# EAGLE board printversion (EAGLE 7.5.0)
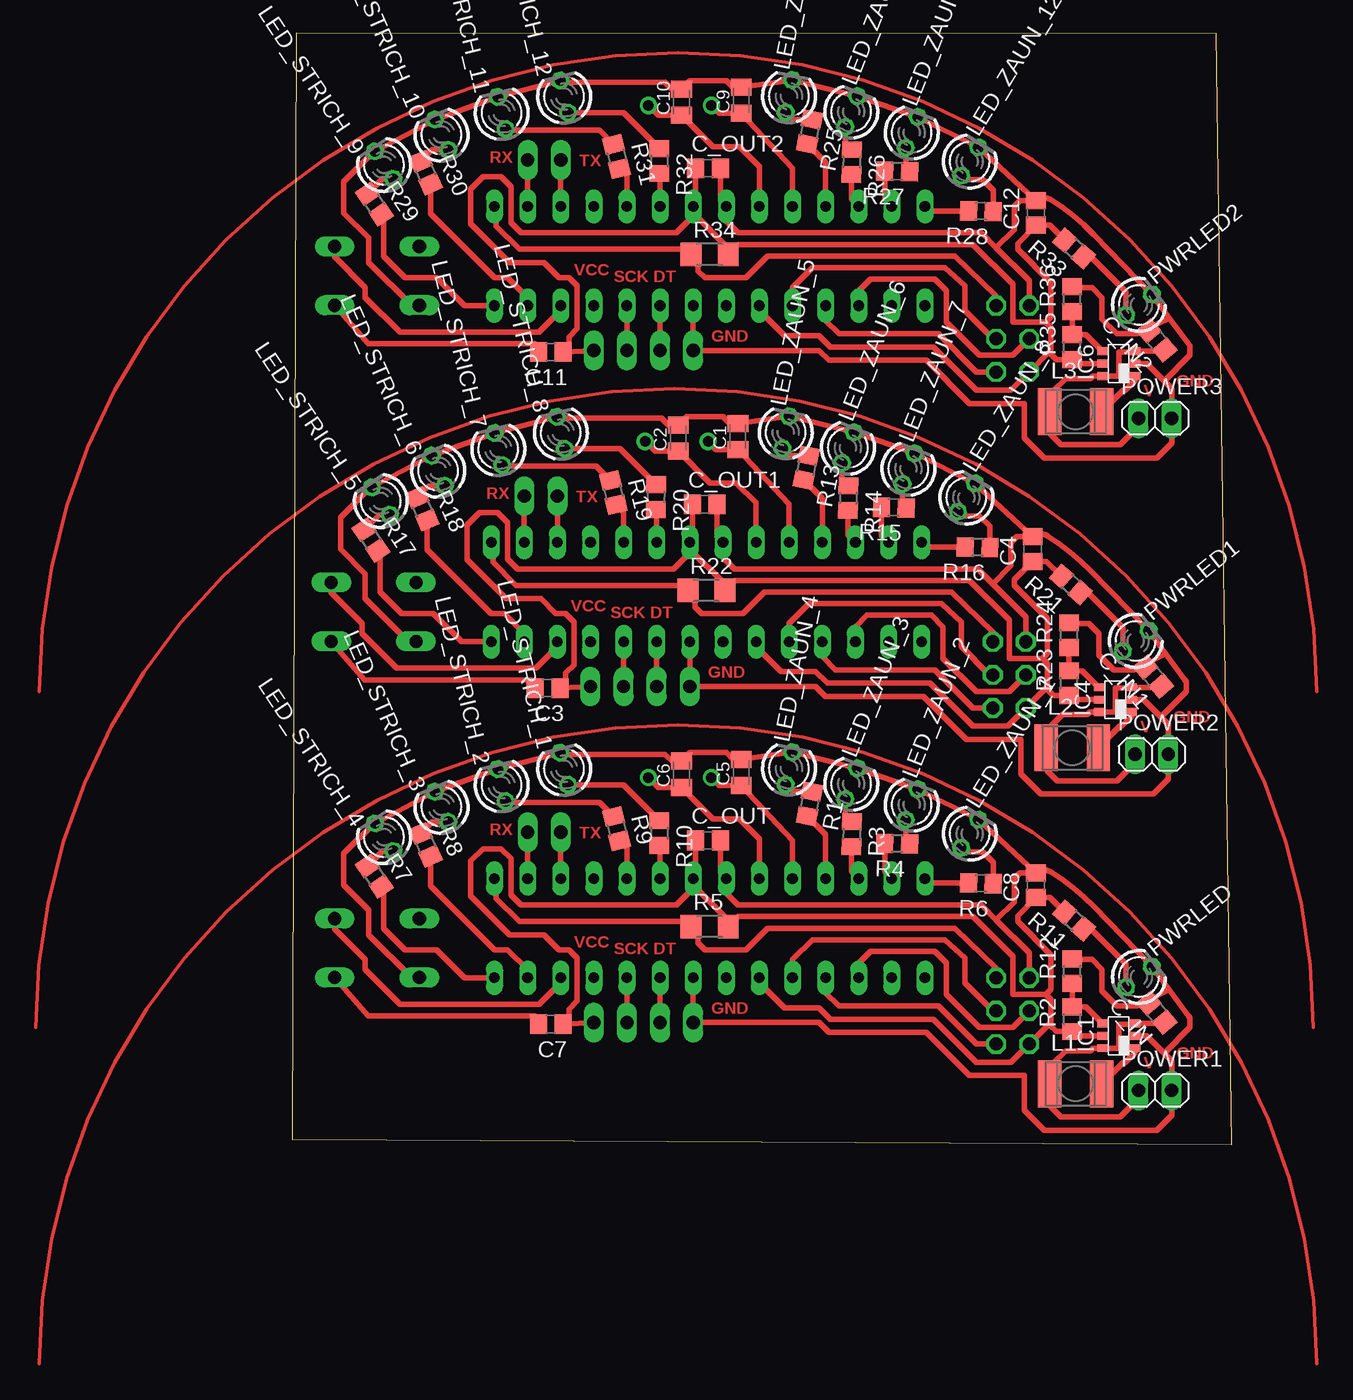
[diagram p0: board, top side]
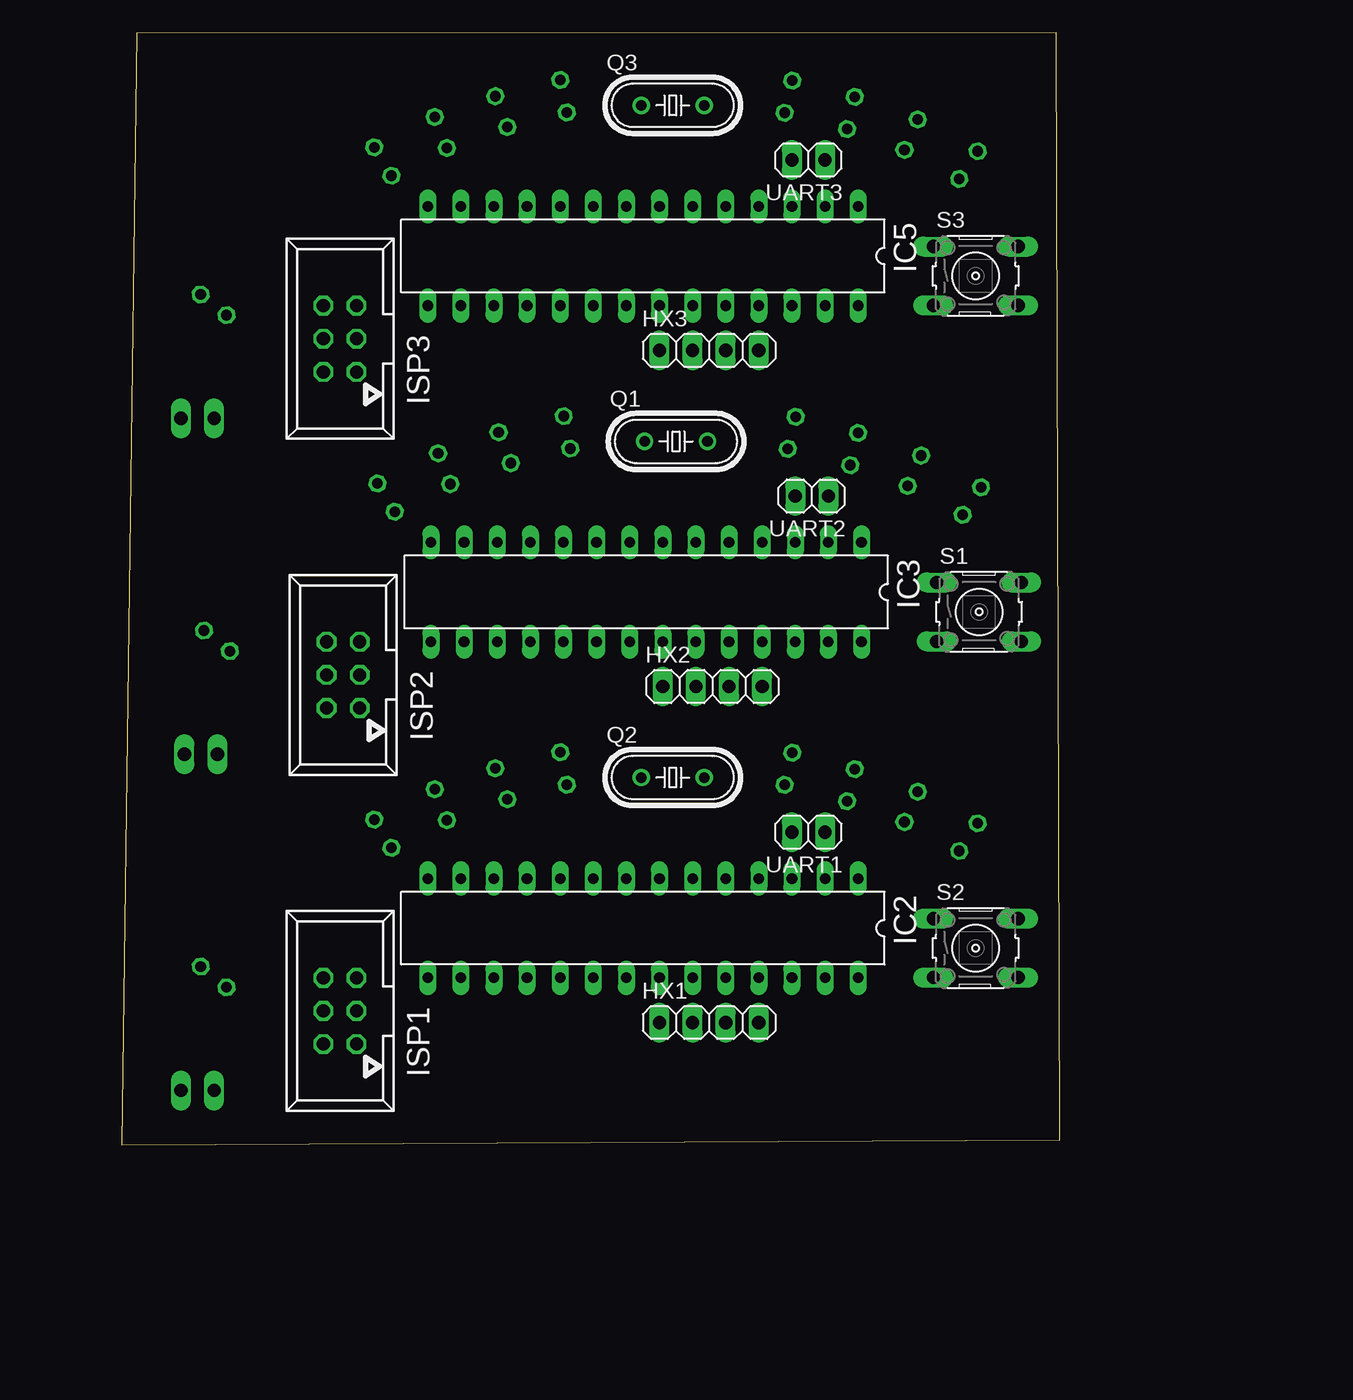
[diagram p1: board, bottom side, seen from below]

Size 71.98 x 85.32 mm. Coordinates in mm from the lower left corner, seen from the top.
Outline: 0,0.37 0.27,85.32 70.8,85.28 71.98,0 0,0.37
Copper layers (1*16): Top 0.035mm / dielectric 1.5mm / Bottom 0.035mm
Design rules "default *": minimum track width 10mil, minimum drill 24mil, track to track 8mil, track to pad 8mil, pad to pad 8mil, via to via 8mil, smd to smd 8mil, copper to edge 25mil, drill to drill 8mil, minimum pad ring 10mil, minimum via ring 8mil, stop-mask expansion 4mil, vias tented up to drill 0mil, thermal gap 10mil

## Footprints (pad centres in the part's own frame; a part is rotated, then mirrored left to right if it is on the bottom)
C0805K = smd 1.3 x 1.6: 1 -1,0; 2 1,0
C0805 = smd 1.3 x 1.5: 1 -0.95,0; 2 0.95,0
1X04 = drill 1.016 long: 1 -3.81,0; 2 -1.27,0; 3 1.27,0; 4 3.81,0
TSOT23-6_DDC = smd 0.6 x 0.8: 1 -0.95,-1.25; 2 0,-1.25; 3 0.95,-1.25; 4 0.95,1.25; 5 0,1.25; 6 -0.95,1.25
DIL28-3 = drill 0.813 long: 1 -16.51,-3.81; 2 -13.97,-3.81; 3 -11.43,-3.81; 4 -8.89,-3.81; 5 -6.35,-3.81; 6 -3.81,-3.81; 7 -1.27,-3.81; 8 1.27,-3.81; 9 3.81,-3.81; 10 6.35,-3.81; 11 8.89,-3.81; 12 11.43,-3.81; 13 13.97,-3.81; 14 16.51,-3.81; 15 16.51,3.81; 16 13.97,3.81; 17 11.43,3.81; 18 8.89,3.81; 19 6.35,3.81; 20 3.81,3.81; 21 1.27,3.81; 22 -1.27,3.81; 23 -3.81,3.81; 24 -6.35,3.81; 25 -8.89,3.81; 26 -11.43,3.81; 27 -13.97,3.81; 28 -16.51,3.81
057-006-1 = drill 1 octagon: 1 -2.54,-1.27; 2 -2.54,1.27; 3 0,-1.27; 4 0,1.27; 5 2.54,-1.27; 6 2.54,1.27
L4532P = smd 1.8 x 3.6: 1 -2,0; 2 2,0
LED3MM = drill 0.813 octagon: A -1.27,0; K 1.27,0
1X02 = drill 1.016 long: 1 -1.27,0; 2 1.27,0
HC49/S = drill 0.813: 1 2.413,0; 2 -2.413,0
R0805 = smd 1.3 x 1.5: 1 -0.95,0; 2 0.95,0
R1206 = smd 1.6 x 1.803: 1 -1.422,0; 2 1.422,0
B3F-10XX = drill 1.016 long: 1 -3.251,2.261; 2 3.251,2.261; 3 -3.251,-2.261; 4 3.251,-2.261

## Placement (x,y rotation side)
C1  18pF  [C0805K]  34.14,54.34 90 top
C2  18pF  [C0805K]  29.57,54.22 90 top
C3  1uF  [C0805]  19.53,35.04 180 top
C4  100n  [C0805]  56.74,45.71 90 top
C5  18pF  [C0805K]  34.39,28.56 90 top
C6  18pF  [C0805K]  29.82,28.43 90 top
C7  1uF  [C0805]  19.79,9.26 180 top
C8  100n  [C0805]  57,19.93 90 top
C9  18pF  [C0805K]  34.39,80.12 90 top
C10  18pF  [C0805K]  29.82,80 90 top
C11  1uF  [C0805]  19.79,60.82 180 top
C12  100n  [C0805]  57,71.49 90 top
C_IN  [C0805]  66.27,10.15 130 top
C_IN1  [C0805]  66.01,35.93 130 top
C_IN2  [C0805]  66.27,61.71 130 top
C_OUT  [C0805]  31.85,23.35 0 top
C_OUT1  [C0805]  31.6,49.14 0 top
C_OUT2  [C0805]  31.85,74.92 0 top
HX1  JP1  [1X04]  26.9,9.38 0 bottom
HX2  JP1  [1X04]  26.64,35.17 0 bottom
HX3  JP1  [1X04]  26.9,60.95 0 bottom
IC1  TPS61070DDC  [TSOT23-6_DDC]  63.35,8.37 90 top
IC2  MEGA8-P  [DIL28-3]  31.98,16.62 180 bottom
IC3  MEGA8-P  [DIL28-3]  31.72,42.4 180 bottom
IC4  TPS61070DDC  [TSOT23-6_DDC]  63.09,34.15 90 top
IC5  MEGA8-P  [DIL28-3]  31.98,68.19 180 bottom
IC6  TPS61070DDC  [TSOT23-6_DDC]  63.35,59.93 90 top
ISP1  ISP-Connector  [057-006-1]  55.22,10.27 90 bottom
ISP2  ISP-Connector  [057-006-1]  54.97,36.05 90 bottom
ISP3  ISP-Connector  [057-006-1]  55.22,61.84 90 bottom
L1  [L4532P]  60.05,4.69 0 top
L2  [L4532P]  59.79,30.47 0 top
L3  [L4532P]  60.05,56.25 0 top
LED_STRICH_1  [LED3MM]  20.81,28.85 103.6 top
LED_STRICH_2  [LED3MM]  16.02,27.6 103.6 top
LED_STRICH_3  [LED3MM]  11.41,25.93 113.6 top
LED_STRICH_4  [LED3MM]  7,23.6 123.6 top
LED_STRICH_5  [LED3MM]  6.75,49.38 123.6 top
LED_STRICH_6  [LED3MM]  11.15,51.71 113.6 top
LED_STRICH_7  [LED3MM]  15.77,53.38 103.6 top
LED_STRICH_8  [LED3MM]  20.56,54.63 103.6 top
LED_STRICH_9  [LED3MM]  7,75.17 123.6 top
LED_STRICH_10  [LED3MM]  11.41,77.49 113.6 top
LED_STRICH_11  [LED3MM]  16.02,79.16 103.6 top
LED_STRICH_12  [LED3MM]  20.81,80.41 103.6 top
LED_ZAUN_1  [LED3MM]  51.93,23.87 58.6 top
LED_ZAUN_2  [LED3MM]  47.48,26.1 68.6 top
LED_ZAUN_3  [LED3MM]  42.84,27.7 68.6 top
LED_ZAUN_4  [LED3MM]  38.07,28.88 78.6 top
LED_ZAUN_5  [LED3MM]  37.81,54.66 78.6 top
LED_ZAUN_6  [LED3MM]  42.59,53.48 68.6 top
LED_ZAUN_7  [LED3MM]  47.23,51.88 68.6 top
LED_ZAUN_8  [LED3MM]  51.68,49.65 58.6 top
LED_ZAUN_9  [LED3MM]  38.07,80.44 78.6 top
LED_ZAUN_10  [LED3MM]  42.84,79.26 68.6 top
LED_ZAUN_11  [LED3MM]  47.48,77.66 68.6 top
LED_ZAUN_12  [LED3MM]  51.93,75.43 58.6 top
POWER1  JP2  [1X02]  66.14,4.18 0 top
POWER2  JP2  [1X02]  65.89,29.96 0 top
POWER3  JP2  [1X02]  66.14,55.74 0 top
PWRLED  [LED3MM]  64.91,12.88 38.6 top
PWRLED1  [LED3MM]  64.66,38.66 38.6 top
PWRLED2  [LED3MM]  64.91,64.45 38.6 top
Q1  16MHz  [HC49/S]  29.44,53.96 0 bottom
Q2  16MHz  [HC49/S]  29.69,28.18 0 bottom
Q3  16MHz  [HC49/S]  29.69,79.74 0 bottom
R1  470  [R0805]  39.63,26.16 258.6 top
R2  [R0805]  59.79,9.64 90 top
R3  470  [R0805]  42.86,23.83 268.6 top
R4  470  [R0805]  46.36,23.1 178.6 top
R5  10k  [R1206]  31.98,16.75 0 top
R6  470  [R0805]  52.78,20.06 178.6 top
R7  470  [R0805]  6.25,20.61 303.6 top
R8  470  [R0805]  10.19,23.02 293.6 top
R9  470  [R0805]  24.84,24.26 283.6 top
R10  470  [R0805]  28.11,23.91 269.6 top
R11  470  [R0805]  59.93,17.21 138.6 top
R12  [R0805]  59.79,13.32 90 top
R13  470  [R0805]  39.38,51.94 258.6 top
R14  470  [R0805]  42.61,49.61 268.6 top
R15  470  [R0805]  46.1,48.88 178.6 top
R16  470  [R0805]  52.52,45.84 178.6 top
R17  470  [R0805]  6,46.39 303.6 top
R18  470  [R0805]  9.93,48.8 293.6 top
R19  470  [R0805]  24.59,50.04 283.6 top
R20  470  [R0805]  27.86,49.7 269.6 top
R21  470  [R0805]  59.67,42.99 138.6 top
R22  10k  [R1206]  31.72,42.53 0 top
R23  [R0805]  59.54,35.42 90 top
R24  [R0805]  59.54,39.1 90 top
R25  470  [R0805]  39.63,77.72 258.6 top
R26  470  [R0805]  42.86,75.39 268.6 top
R27  470  [R0805]  46.36,74.67 178.6 top
R28  470  [R0805]  52.78,71.62 178.6 top
R29  470  [R0805]  6.25,72.18 303.6 top
R30  470  [R0805]  10.19,74.58 293.6 top
R31  470  [R0805]  24.84,75.82 283.6 top
R32  470  [R0805]  28.11,75.48 269.6 top
R33  470  [R0805]  59.93,68.77 138.6 top
R34  10k  [R1206]  31.98,68.31 0 top
R35  [R0805]  59.79,61.2 90 top
R36  [R0805]  59.79,64.88 90 top
S1  S1  [B3F-10XX]  6.2,40.88 0 bottom
S2  S1  [B3F-10XX]  6.45,15.1 0 bottom
S3  S1  [B3F-10XX]  6.45,66.66 0 bottom
UART1  JP2  [1X02]  19.28,23.99 180 bottom
UART2  JP2  [1X02]  19.02,49.77 180 bottom
UART3  JP2  [1X02]  19.28,75.55 180 bottom

## Library data of the parts
C1 C2 C5 C6 C9 C10 R1-R4 R6-R21 R23-R33 R35 R36 = resistor
C3 C4 C7 C8 C11 C12 C_IN C_IN1 C_IN2 C_OUT C_OUT1 C_OUT2 R5 R22 R34 = rcl-2
HX1-HX3 POWER1-POWER3 UART1-UART3 = pinhead
IC1 IC4 IC6 = texas; MPN: TPS61070DDCR; OC_FARNELL: 1461062; OC_NEWARK: 64M3125
IC2 IC3 IC5 = atmel; OC_FARNELL: unknown; OC_NEWARK: unknown
ISP1-ISP3 = con-panduit; OC_FARNELL: unknown; OC_NEWARK: unknown
L1-L3 = rcl
LED_STRICH_1-LED_STRICH_12 LED_ZAUN_1-LED_ZAUN_12 PWRLED PWRLED1 PWRLED2 = led
Q1-Q3 = crystal; OC_FARNELL: 1667008; OC_NEWARK: unknown
S1-S3 = switch-omron; MPN: B3F-1000; OC_FARNELL: 176432; OC_NEWARK: 36M3542

## Nets
+5V: C7.1 C8.1 C_OUT.1 HX1.4 IC1.5 IC2.7 IC2.20 ISP1.2 R2.1 R5.2 R11.2
+5V1: C3.1 C4.1 C_OUT1.1 HX2.4 IC3.7 IC3.20 IC4.5 ISP2.2 R21.2 R22.2 R23.1
+5V2: C11.1 C12.1 C_OUT2.1 HX3.4 IC5.7 IC5.20 IC6.5 ISP3.2 R33.2 R34.2 R35.1
GND: C5.2 C6.2 C8.2 C_IN.2 C_OUT.2 HX1.1 IC1.2 IC2.8 IC2.22 ISP1.6 LED_STRICH_1.K LED_STRICH_2.K LED_STRICH_3.K LED_STRICH_4.K LED_ZAUN_1.K LED_ZAUN_2.K LED_ZAUN_3.K LED_ZAUN_4.K POWER1.2 PWRLED.K R12.2 S2.3
GND1: C1.2 C2.2 C4.2 C_IN1.2 C_OUT1.2 HX2.1 IC3.8 IC3.22 IC4.2 ISP2.6 LED_STRICH_5.K LED_STRICH_6.K LED_STRICH_7.K LED_STRICH_8.K LED_ZAUN_5.K LED_ZAUN_6.K LED_ZAUN_7.K LED_ZAUN_8.K POWER2.2 PWRLED1.K R24.2 S1.3
GND2: C9.2 C10.2 C12.2 C_IN2.2 C_OUT2.2 HX3.1 IC5.8 IC5.22 IC6.2 ISP3.6 LED_STRICH_9.K LED_STRICH_10.K LED_STRICH_11.K LED_STRICH_12.K LED_ZAUN_9.K LED_ZAUN_10.K LED_ZAUN_11.K LED_ZAUN_12.K POWER3.2 PWRLED2.K R36.2 S3.3
N$1: LED_ZAUN_4.A R1.1
N$2: LED_ZAUN_3.A R3.1
N$3: LED_ZAUN_2.A R4.1
N$4: C5.1 IC2.10 Q2.2
N$5: IC1.1 L1.2
N$6: IC1.4 R2.2 R12.1
N$7: LED_ZAUN_1.A R6.1
N$8: LED_STRICH_4.A R7.1
N$10: LED_STRICH_3.A R8.1
N$11: LED_STRICH_2.A R9.1
N$12: LED_STRICH_1.A R10.1
N$13: PWRLED.A R11.1
N$14: C6.1 IC2.9 Q2.1
N$15: C7.2 S2.4
N$16: LED_ZAUN_5.A R13.1
N$17: LED_ZAUN_6.A R14.1
N$18: LED_ZAUN_7.A R15.1
N$19: LED_ZAUN_8.A R16.1
N$20: LED_STRICH_5.A R17.1
N$21: LED_STRICH_6.A R18.1
N$22: LED_STRICH_7.A R19.1
N$23: LED_STRICH_8.A R20.1
N$24: PWRLED1.A R21.1
N$25: C1.1 IC3.10 Q1.2
N$26: C2.1 IC3.9 Q1.1
N$27: C3.2 S1.4
N$28: IC4.1 L2.2
N$29: IC4.4 R23.2 R24.1
N$31: LED_ZAUN_9.A R25.1
N$32: LED_ZAUN_10.A R26.1
N$33: LED_ZAUN_11.A R27.1
N$34: LED_ZAUN_12.A R28.1
N$35: LED_STRICH_9.A R29.1
N$36: LED_STRICH_10.A R30.1
N$37: LED_STRICH_11.A R31.1
N$38: LED_STRICH_12.A R32.1
N$39: PWRLED2.A R33.1
N$40: C9.1 IC5.10 Q3.2
N$41: C10.1 IC5.9 Q3.1
N$42: C11.2 S3.4
N$43: IC6.1 L3.2
N$44: IC6.4 R35.2 R36.1
PB0/LED_ZAUN_1: IC2.14 R6.2
PB0/LED_ZAUN_2: IC3.14 R16.2
PB0/LED_ZAUN_3: IC5.14 R28.2
PB1: IC2.15
PB2: IC2.16
PB3: IC3.16
PB3/MOSI: IC2.17 ISP1.4
PB3/MOSI1: IC3.17 ISP2.4
PB3/MOSI2: IC5.17 ISP3.4
PB4: IC3.15
PB4/MISO: IC2.18 ISP1.1
PB4/MISO1: IC3.18 ISP2.1
PB4/MISO2: IC5.18 ISP3.1
PB5: IC5.16
PB5/SCK: IC2.19 ISP1.3
PB5/SCK1: IC3.19 ISP2.3
PB5/SCK2: IC5.19 ISP3.3
PB6: IC5.15
PC0/DT: HX1.2 IC2.23
PC0/DT1: HX2.2 IC3.23
PC0/DT2: HX3.2 IC5.23
PC1: IC3.25
PC1/SCK: HX1.3 IC2.24
PC1/SCK1: HX2.3 IC3.24
PC1/SCK2: HX3.3 IC5.24
PC2: IC2.25
PC3: IC2.26 S2.2
PC4: IC3.26 S1.2
PC4/LED_STRICH_1: IC3.27 R18.2
PC4/LED_STRICH_2: IC5.27 R30.2
PC4/LED_STRICH_3: IC2.27 R8.2
PC5: IC5.25
PC5/LED_STRICH_1: IC3.28 R17.2
PC5/LED_STRICH_2: IC5.28 R29.2
PC5/LED_STRICH_4: IC2.28 R7.2
PC6: IC5.26 S3.2
PD0/RXD: IC2.2 UART1.1
PD0/RXD1: IC3.2 UART2.1
PD0/RXD2: IC5.2 UART3.1
PD1: IC3.4
PD1/TXD: IC2.3 UART1.2
PD1/TXD1: IC3.3 UART2.2
PD1/TXD2: IC5.3 UART3.2
PD2: IC2.4
PD3: IC5.4
PD3/LED_STRICH_1: IC3.5 R19.2
PD3/LED_STRICH_2: IC2.5 R9.2
PD3/LED_STRICH_3: IC5.5 R31.2
PD4/LED_STRICH_1: IC2.6 R10.2
PD4/LED_STRICH_2: IC3.6 R20.2
PD4/LED_STRICH_3: IC5.6 R32.2
PD5/LED_ZAUN_1: IC3.11 R13.2
PD5/LED_ZAUN_2: IC5.11 R25.2
PD5/LED_ZAUN_4: IC2.11 R1.2
PD6/LED_ZAUN_1: IC3.12 R14.2
PD6/LED_ZAUN_2: IC5.12 R26.2
PD6/LED_ZAUN_3: IC2.12 R3.2
PD7/LED_ZAUN_1: IC3.13 R15.2
PD7/LED_ZAUN_2: IC2.13 R4.2
PD7/LED_ZAUN_3: IC5.13 R27.2
RESET: IC2.1 ISP1.5 R5.1
RESET1: IC3.1 ISP2.5 R22.1
RESET2: IC5.1 ISP3.5 R34.1
V_IN: C_IN.1 IC1.3 IC1.6 L1.1 POWER1.1
V_IN1: C_IN1.1 IC4.3 IC4.6 L2.1 POWER2.1
V_IN2: C_IN2.1 IC6.3 IC6.6 L3.1 POWER3.1
VDD: IC2.21
VDD1: IC3.21
VDD2: IC5.21

## Tracks (layer width: path | path; a pad name or v marks a point on that pad's centre or on a via)
+5V
  Top 0.406: 30.71,19.67 IC2.7 30.9,20.63 C_OUT.1 | 57.76,11.54 55.22,11.54 55.22,14.46 52.17,17.51 34.16,17.51 R5.2 33.12,17.03 33.12,17.51 30.96,19.67 30.71,19.67 | 57.76,11.54 58.14,11.16 58.14,9.38 58.01,9.26 | 58.01,9.26 ISP1.2 55.09,6.34 52.43,6.34 49.12,9.64 41.25,9.64 40.36,10.53 37.69,10.53 35.79,12.43 IC2.20 | HX1.4 C7.1 21.18,9.32 21.18,10.4 21.82,11.04 21.82,14.34 21.18,14.97 20.42,14.97 19.28,16.12 16.61,16.12 13.62,19.1 13.62,21.76 14.58,22.72 15.98,22.72 16.74,21.96 16.74,19.16 17.5,18.4 29.44,18.4 30.71,19.67 | 57.76,11.54 58.14,11.92 58.14,14.59 55.6,17.13 55.6,17.58 C8.1 58.08,18.98 R11.2 | IC1.5 62.04,8.31 61.98,8.37 60.17,8.37 59.85,8.69 R2.1 58.58,8.69 58.01,9.26
+5V1
  Top 0.406: 30.45,45.45 IC3.7 30.65,46.41 C_OUT1.1 | 57.51,37.32 54.97,37.32 54.97,40.25 51.92,43.29 33.91,43.29 R22.2 32.87,42.81 32.87,43.29 30.71,45.45 30.45,45.45 | 57.51,37.32 57.89,36.94 57.89,35.17 57.76,35.04 | 57.76,35.04 ISP2.2 54.84,32.12 52.17,32.12 48.87,35.42 41,35.42 40.11,36.31 37.44,36.31 35.53,38.21 IC3.20 | HX2.4 C3.1 20.93,35.1 20.93,36.18 21.56,36.82 21.56,40.12 20.93,40.75 20.17,40.75 19.02,41.9 16.36,41.9 13.37,44.88 13.37,47.55 14.33,48.5 15.72,48.5 16.48,47.74 16.48,44.94 17.25,44.18 29.18,44.18 30.45,45.45 | 57.51,37.32 57.89,37.71 57.89,40.37 55.35,42.91 55.35,43.36 C4.1 57.82,44.76 R21.2 | IC4.5 61.78,34.09 61.72,34.15 59.92,34.15 59.6,34.47 R23.1 58.33,34.47 57.76,35.04
+5V2
  Top 0.406: 30.71,71.23 IC5.7 30.9,72.19 C_OUT2.1 | 57.76,63.11 55.22,63.11 55.22,66.03 52.17,69.07 34.16,69.07 R34.2 33.12,68.59 33.12,69.07 30.96,71.23 30.71,71.23 | 57.76,63.11 58.14,62.72 58.14,60.95 58.01,60.82 | 58.01,60.82 ISP3.2 55.09,57.9 52.43,57.9 49.12,61.2 41.25,61.2 40.36,62.09 37.69,62.09 35.79,63.99 IC5.20 | HX3.4 C11.1 21.18,60.89 21.18,61.96 21.82,62.6 21.82,65.9 21.18,66.53 20.42,66.53 19.28,67.68 16.61,67.68 13.62,70.66 13.62,73.33 14.58,74.28 15.98,74.28 16.74,73.52 16.74,70.73 17.5,69.96 29.44,69.96 30.71,71.23 | 57.76,63.11 58.14,63.49 58.14,66.15 55.6,68.69 55.6,69.14 C12.1 58.08,70.54 R33.2 | IC6.5 62.04,59.87 61.98,59.93 60.17,59.93 59.85,60.25 R35.1 58.58,60.25 58.01,60.82
GND
  Top 0.406: S2.3 9.09,12.84 5.82,16.12 5.82,18.02 3.91,19.93 3.91,22.34 6.23,24.66 LED_STRICH_4.K LED_STRICH_3.K LED_STRICH_2.K LED_STRICH_1.K 20.64,29.96 28.55,29.96 29.07,29.43 C6.2 30.47,30.09 33.25,30.09 33.77,29.56 C5.2 LED_ZAUN_4.K LED_ZAUN_3.K LED_ZAUN_2.K LED_ZAUN_1.K C8.2 | C_OUT.2 32.8,20.88 IC2.8 33.25,19.29 34.14,18.4 52.81,18.4 53.95,17.26 | IC2.22 HX1.1 40.36,9.38 41.12,8.62 48.62,8.62 51.92,5.32 56.11,5.32 56.11,2.65 57.63,1.13 66.27,1.13 67.41,2.27 POWER1.2 67.41,6.46 66.84,7.04 | 53.95,17.26 56.49,14.72 ISP1.6 | 53.95,17.26 55.35,18.66 55.35,20.43 55.79,20.88 C8.2 | C8.2 arc-71 58.14,20.94 arc-14 61.44,18.27 PWRLED.K 67.23,11.87 | 64.74,10.65 63.22,10.65 62.08,11.8 62.08,13.45 61.32,14.21 59.85,14.21 R12.2 | IC1.2 65.51,8.37 66.84,7.04 | 67.23,11.87 68.68,9.89 68.81,9.77 68.81,9 66.84,7.04 | 64.74,10.65 C_IN.2 | 64.74,10.65 67.23,11.87
GND1
  Top 0.406: S1.3 8.84,38.62 5.56,41.9 5.56,43.8 3.66,45.71 3.66,48.12 5.98,50.44 LED_STRICH_5.K LED_STRICH_6.K LED_STRICH_7.K LED_STRICH_8.K 20.38,55.74 28.3,55.74 28.82,55.22 C2.2 30.22,55.87 32.99,55.87 33.52,55.34 C1.2 LED_ZAUN_5.K LED_ZAUN_6.K LED_ZAUN_7.K LED_ZAUN_8.K C4.2 | C_OUT1.2 32.55,46.66 IC3.8 32.99,45.07 33.88,44.18 52.55,44.18 53.7,43.04 | IC3.22 HX2.1 40.11,35.17 40.87,34.4 48.36,34.4 51.66,31.1 55.85,31.1 55.85,28.43 57.38,26.91 66.01,26.91 67.16,28.05 POWER2.2 67.16,32.24 66.59,32.82 | 53.7,43.04 56.24,40.5 ISP2.6 | 53.7,43.04 55.09,44.44 55.09,46.21 55.53,46.66 C4.2 | C4.2 arc-71 57.89,46.72 arc-14 61.19,44.06 PWRLED1.K 66.97,37.65 | 64.49,36.44 62.97,36.44 61.82,37.58 61.82,39.23 61.06,39.99 59.6,39.99 R24.2 | IC4.2 65.25,34.15 66.59,32.82 | 66.97,37.65 68.43,35.67 68.55,35.55 68.55,34.78 66.59,32.82 | 64.49,36.44 C_IN1.2 | 64.49,36.44 66.97,37.65
GND2
  Top 0.406: S3.3 9.09,64.4 5.82,67.68 5.82,69.58 3.91,71.49 3.91,73.9 6.23,76.22 LED_STRICH_9.K LED_STRICH_10.K LED_STRICH_11.K LED_STRICH_12.K 20.64,81.52 28.55,81.52 29.07,81 C10.2 30.47,81.65 33.25,81.65 33.77,81.12 C9.2 LED_ZAUN_9.K LED_ZAUN_10.K LED_ZAUN_11.K LED_ZAUN_12.K C12.2 | C_OUT2.2 32.8,72.44 IC5.8 33.25,70.85 34.14,69.96 52.81,69.96 53.95,68.82 | IC5.22 HX3.1 40.36,60.95 41.12,60.18 48.62,60.18 51.92,56.88 56.11,56.88 56.11,54.22 57.63,52.69 66.27,52.69 67.41,53.83 POWER3.2 67.41,58.03 66.84,58.6 | 53.95,68.82 56.49,66.28 ISP3.6 | 53.95,68.82 55.35,70.22 55.35,72 55.79,72.44 C12.2 | C12.2 arc-71 58.14,72.5 arc-14 61.44,69.84 PWRLED2.K 67.23,63.44 | 64.74,62.22 63.22,62.22 62.08,63.36 62.08,65.01 61.32,65.77 59.85,65.77 R36.2 | IC6.2 65.51,59.93 66.84,58.6 | 67.23,63.44 68.68,61.45 68.81,61.33 68.81,60.57 66.84,58.6 | 64.74,62.22 C_IN2.2 | 64.74,62.22 67.23,63.44
N$1
  Top 0.406: R1.1 38.36,27.09 LED_ZAUN_4.A
N$2
  Top 0.406: R3.1 42.38,25.29 LED_ZAUN_3.A
N$3
  Top 0.406: R4.1 47.02,23.37 LED_ZAUN_2.A
N$4
  Top 0.406: IC2.10 38.33,23.37 C5.1 32.72,27.56 Q2.2
N$5
  Top 0.406: IC1.1 64.62,7.4 64.62,7.1 63.86,6.34 63.7,6.34 L1.2
N$6
  Top 0.406: R12.1 R2.2 60.83,10.59 IC1.4
N$7
  Top 0.406: R6.1 53.73,21.67 52.93,22.47 51.59,22.47 LED_ZAUN_1.A
N$8
  Top 0.406: LED_STRICH_4.A 6.87,22.55 R7.1
N$9
  Top 0.254: -19.46,-16.78 arc-180 78.54,-16.78
N$10
  Top 0.406: LED_STRICH_3.A 10.68,24.77 R8.1
N$11
  Top 0.406: LED_STRICH_2.A 16.41,26.28 23.52,26.28 R9.1
N$12
  Top 0.406: R10.1 25.37,27.61 LED_STRICH_1.A
N$13
  Top 0.406: PWRLED.A 63.92,13.89 61.23,16.58 R11.1
N$14
  Top 0.406: IC2.9 35.79,23.48 34.26,25.01 32.25,25.01 C6.1 28.03,27.43 Q2.1
N$15
  Top 0.406: S2.4 5.77,9.89 18.58,9.89 C7.2
N$16
  Top 0.406: R13.1 38.1,52.87 LED_ZAUN_5.A
N$17
  Top 0.406: R14.1 42.12,51.07 LED_ZAUN_6.A
N$18
  Top 0.406: R15.1 46.76,49.15 LED_ZAUN_7.A
N$19
  Top 0.406: R16.1 53.47,47.45 52.68,48.25 51.34,48.25 LED_ZAUN_8.A
N$20
  Top 0.406: LED_STRICH_5.A 6.61,48.33 R17.1
N$21
  Top 0.406: LED_STRICH_6.A 10.43,50.55 R18.1
N$22
  Top 0.406: LED_STRICH_7.A 16.15,52.06 23.27,52.06 R19.1
N$23
  Top 0.406: R20.1 25.11,53.39 LED_STRICH_8.A
N$24
  Top 0.406: PWRLED1.A 63.66,39.67 60.98,42.36 R21.1
N$25
  Top 0.406: IC3.10 38.07,49.15 C1.1 32.47,53.34 Q1.2
N$26
  Top 0.406: IC3.9 35.53,49.26 34.01,50.79 31.99,50.79 C2.1 27.77,53.22 Q1.1
N$27
  Top 0.406: S1.4 5.51,35.67 18.33,35.67 C3.2
N$28
  Top 0.406: IC4.1 64.36,33.18 64.36,32.88 63.6,32.12 63.44,32.12 L2.2
N$29
  Top 0.406: R24.1 R23.2 60.57,36.37 IC4.4
N$30
  Top 0.254: -19.71,9 arc-180 78.29,9
N$31
  Top 0.406: R25.1 38.36,78.65 LED_ZAUN_9.A
N$32
  Top 0.406: R26.1 42.38,76.85 LED_ZAUN_10.A
N$33
  Top 0.406: R27.1 47.02,74.93 LED_ZAUN_11.A
N$34
  Top 0.406: R28.1 53.73,73.24 52.93,74.03 51.59,74.03 LED_ZAUN_12.A
N$35
  Top 0.406: LED_STRICH_9.A 6.87,74.11 R29.1
N$36
  Top 0.406: LED_STRICH_10.A 10.68,76.33 R30.1
N$37
  Top 0.406: LED_STRICH_11.A 16.41,77.84 23.52,77.84 R31.1
N$38
  Top 0.406: R32.1 25.37,79.18 LED_STRICH_12.A
N$39
  Top 0.406: PWRLED2.A 63.92,65.46 61.23,68.14 R33.1
N$40
  Top 0.406: IC5.10 38.33,74.93 C9.1 32.72,79.12 Q3.2
N$41
  Top 0.406: IC5.9 35.79,75.04 34.26,76.57 32.25,76.57 C10.1 28.03,79 Q3.1
N$42
  Top 0.406: S3.4 5.77,61.45 18.58,61.45 C11.2
N$43
  Top 0.406: IC6.1 64.62,58.96 64.62,58.66 63.86,57.9 63.7,57.9 L3.2
N$44
  Top 0.406: R36.1 R35.2 60.83,62.15 IC6.4
N$45
  Top 0.254: -19.46,34.78 arc-180 78.54,34.78
PB0/LED_ZAUN_1
  Top 0.406: IC2.14 48.84,20.08 R6.2
PB0/LED_ZAUN_2
  Top 0.406: IC3.14 48.59,45.86 R16.2
PB0/LED_ZAUN_3
  Top 0.406: IC5.14 48.84,71.64 R28.2
PB3/MOSI
  Top 0.406: IC2.17 43.41,13.96 44.3,14.85 49.25,14.85 50.14,13.96 50.14,11.54 52.68,9 55.22,9 ISP1.4
PB3/MOSI1
  Top 0.406: IC3.17 43.15,39.74 44.04,40.63 49,40.63 49.89,39.74 49.89,37.32 52.43,34.78 54.97,34.78 ISP2.4
PB3/MOSI2
  Top 0.406: IC5.17 43.41,65.52 44.3,66.41 49.25,66.41 50.14,65.52 50.14,63.11 52.68,60.57 55.22,60.57 ISP3.4
PB4/MISO
  Top 0.406: ISP1.1 52.43,7.73 49.5,10.65 41.88,10.65 40.87,11.67 IC2.18
PB4/MISO1
  Top 0.406: ISP2.1 52.17,33.51 49.25,36.44 41.63,36.44 40.61,37.45 IC3.18
PB4/MISO2
  Top 0.406: ISP3.1 52.43,59.3 49.5,62.22 41.88,62.22 40.87,63.23 IC5.18
PB5/SCK
  Top 0.406: IC2.19 38.33,14.21 39.85,15.73 50.01,15.73 51.54,14.34 51.54,12.43 53.7,10.27 ISP1.3
PB5/SCK1
  Top 0.406: IC3.19 38.07,39.99 39.6,41.52 49.76,41.52 51.28,40.12 51.28,38.21 53.44,36.05 ISP2.3
PB5/SCK2
  Top 0.406: IC5.19 38.33,65.77 39.85,67.3 50.01,67.3 51.54,65.9 51.54,63.99 53.7,61.84 ISP3.3
PC0/DT
  Top 0.406: HX1.2 IC2.23
PC0/DT1
  Top 0.406: HX2.2 IC3.23
PC0/DT2
  Top 0.406: HX3.2 IC5.23
PC1/SCK
  Top 0.406: HX1.3 IC2.24
PC1/SCK1
  Top 0.406: HX2.3 IC3.24
PC1/SCK2
  Top 0.406: HX3.3 IC5.24
PC3
  Top 0.406: IC2.26 20.55,12.43 18.9,10.78 8.23,10.78 5.56,13.45 5.56,14.21 3.2,16.57 S2.2
PC4
  Top 0.406: IC3.26 20.29,38.21 18.64,36.56 7.98,36.56 5.31,39.23 5.31,39.99 2.95,42.35 S1.2
PC4/LED_STRICH_1
  Top 0.406: IC3.27 17.75,39.23 16.23,40.75 15.21,40.75 10.31,45.66 R18.2
PC4/LED_STRICH_2
  Top 0.406: IC5.27 18.01,65.01 16.48,66.53 15.47,66.53 10.57,71.44 R30.2
PC4/LED_STRICH_3
  Top 0.406: IC2.27 18.01,13.45 16.48,14.97 15.47,14.97 10.57,19.87 R8.2
PC5/LED_STRICH_1
  Top 0.406: IC3.28 12.93,38.59 10.77,40.75 8.36,40.75 6.71,42.4 6.71,45.15 R17.2
PC5/LED_STRICH_2
  Top 0.406: IC5.28 13.18,64.38 11.02,66.53 8.61,66.53 6.96,68.19 6.96,70.93 R29.2
PC5/LED_STRICH_4
  Top 0.406: IC2.28 13.18,12.81 11.02,14.97 8.61,14.97 6.96,16.62 6.96,19.37 R7.2
PC6
  Top 0.406: IC5.26 20.55,63.99 18.9,62.34 8.23,62.34 5.56,65.01 5.56,65.77 3.2,68.13 S3.2
PD0/RXD
  Top 0.406: IC2.2 UART1.1
PD0/RXD1
  Top 0.406: IC3.2 UART2.1
PD0/RXD2
  Top 0.406: IC5.2 UART3.1
PD1/TXD
  Top 0.406: IC2.3 UART1.2
PD1/TXD1
  Top 0.406: IC3.3 UART2.2
PD1/TXD2
  Top 0.406: IC5.3 UART3.2
PD3/LED_STRICH_1
  Top 0.406: R19.2 25.37,48.55 IC3.5
PD3/LED_STRICH_2
  Top 0.406: R9.2 25.63,22.77 IC2.5
PD3/LED_STRICH_3
  Top 0.406: R31.2 25.63,74.33 IC5.5
PD4/LED_STRICH_1
  Top 0.406: IC2.6 28.17,22.9 arc90 R10.2
PD4/LED_STRICH_2
  Top 0.406: IC3.6 27.91,48.68 arc90 R20.2
PD4/LED_STRICH_3
  Top 0.406: IC5.6 28.17,74.46 arc90 R32.2
PD5/LED_ZAUN_1
  Top 0.406: IC3.11 40.61,49.59 R13.2
PD5/LED_ZAUN_2
  Top 0.406: IC5.11 40.87,75.37 R25.2
PD5/LED_ZAUN_4
  Top 0.406: IC2.11 40.87,23.81 R1.2
PD6/LED_ZAUN_1
  Top 0.406: IC3.12 42.58,46.78 R14.2
PD6/LED_ZAUN_2
  Top 0.406: IC5.12 42.84,72.57 R26.2
PD6/LED_ZAUN_3
  Top 0.406: IC2.12 42.84,21 R3.2
PD7/LED_ZAUN_1
  Top 0.406: IC3.13 45.15,46.76 R15.2
PD7/LED_ZAUN_2
  Top 0.406: IC2.13 45.41,20.98 R4.2
PD7/LED_ZAUN_3
  Top 0.406: IC5.13 45.41,72.54 R27.2
RESET
  Top 0.406: IC2.1 15.6,20.43 15.6,18.91 17.37,17.13 30.18,17.13 R5.1 31.09,16.22 31.09,15.48 31.6,14.97 34.77,14.97 36.42,16.62 50.77,16.62 53.95,13.58 ISP1.5
RESET1
  Top 0.406: IC3.1 15.34,46.21 15.34,44.69 17.12,42.91 29.92,42.91 R22.1 30.84,42 30.84,41.26 31.34,40.75 34.52,40.75 36.17,42.4 50.52,42.4 53.7,39.36 ISP2.5
RESET2
  Top 0.406: IC5.1 15.6,72 15.6,70.47 17.37,68.69 30.18,68.69 R34.1 31.09,67.78 31.09,67.04 31.6,66.53 34.77,66.53 36.42,68.19 50.77,68.19 53.95,65.14 ISP3.5
V_IN
  Top 0.406: POWER1.1 64.87,3.54 63.47,2.15 58.9,2.15 58.14,2.91 58.14,4.59 L1.1 58.27,4.91 58.27,6.21 59.28,7.23 61.19,7.23 61.38,7.42 IC1.6 63.35,7.42 63.35,9.26 64.6,9.26 IC1.3 66.99,9.32 C_IN.1
V_IN1
  Top 0.406: POWER2.1 64.62,29.32 63.22,27.93 58.65,27.93 57.89,28.69 57.89,30.37 L2.1 58.01,30.69 58.01,31.99 59.03,33.01 60.93,33.01 61.13,33.2 IC4.6 63.09,33.2 63.09,35.04 64.34,35.04 IC4.3 66.74,35.1 C_IN1.1
V_IN2
  Top 0.406: POWER3.1 64.87,55.1 63.47,53.71 58.9,53.71 58.14,54.47 58.14,56.15 L3.1 58.27,56.47 58.27,57.77 59.28,58.79 61.19,58.79 61.38,58.98 IC6.6 63.35,58.98 63.35,60.82 64.6,60.82 IC6.3 66.99,60.88 C_IN2.1

## Text on the board
Top: RX | TX | VCC | SCK | DT | GND | V | GND | RX | TX | VCC | SCK | DT | GND | GND | V | RX | TX | VCC | SCK | DT | GND | GND | V